# EAGLE board BareBonesArduino-OtherMill-DoubleSided (EAGLE 8.0.0)
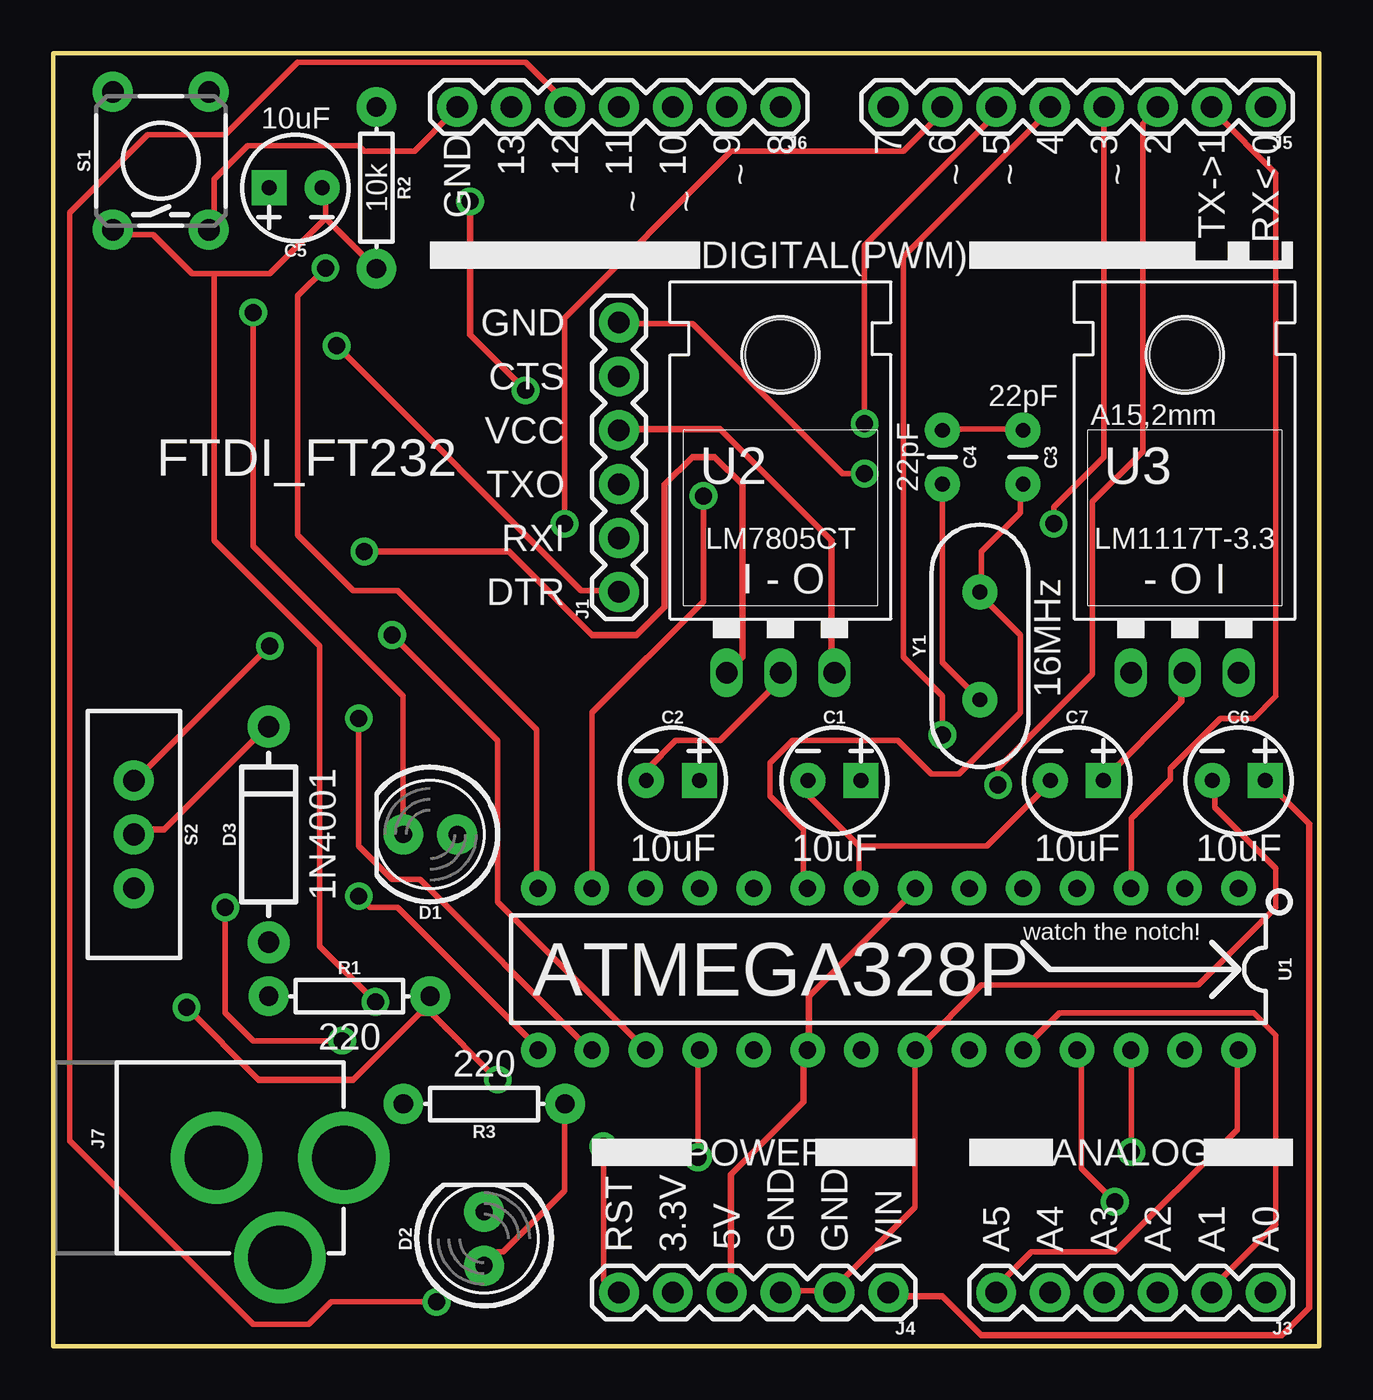
[diagram p0: board, top side]
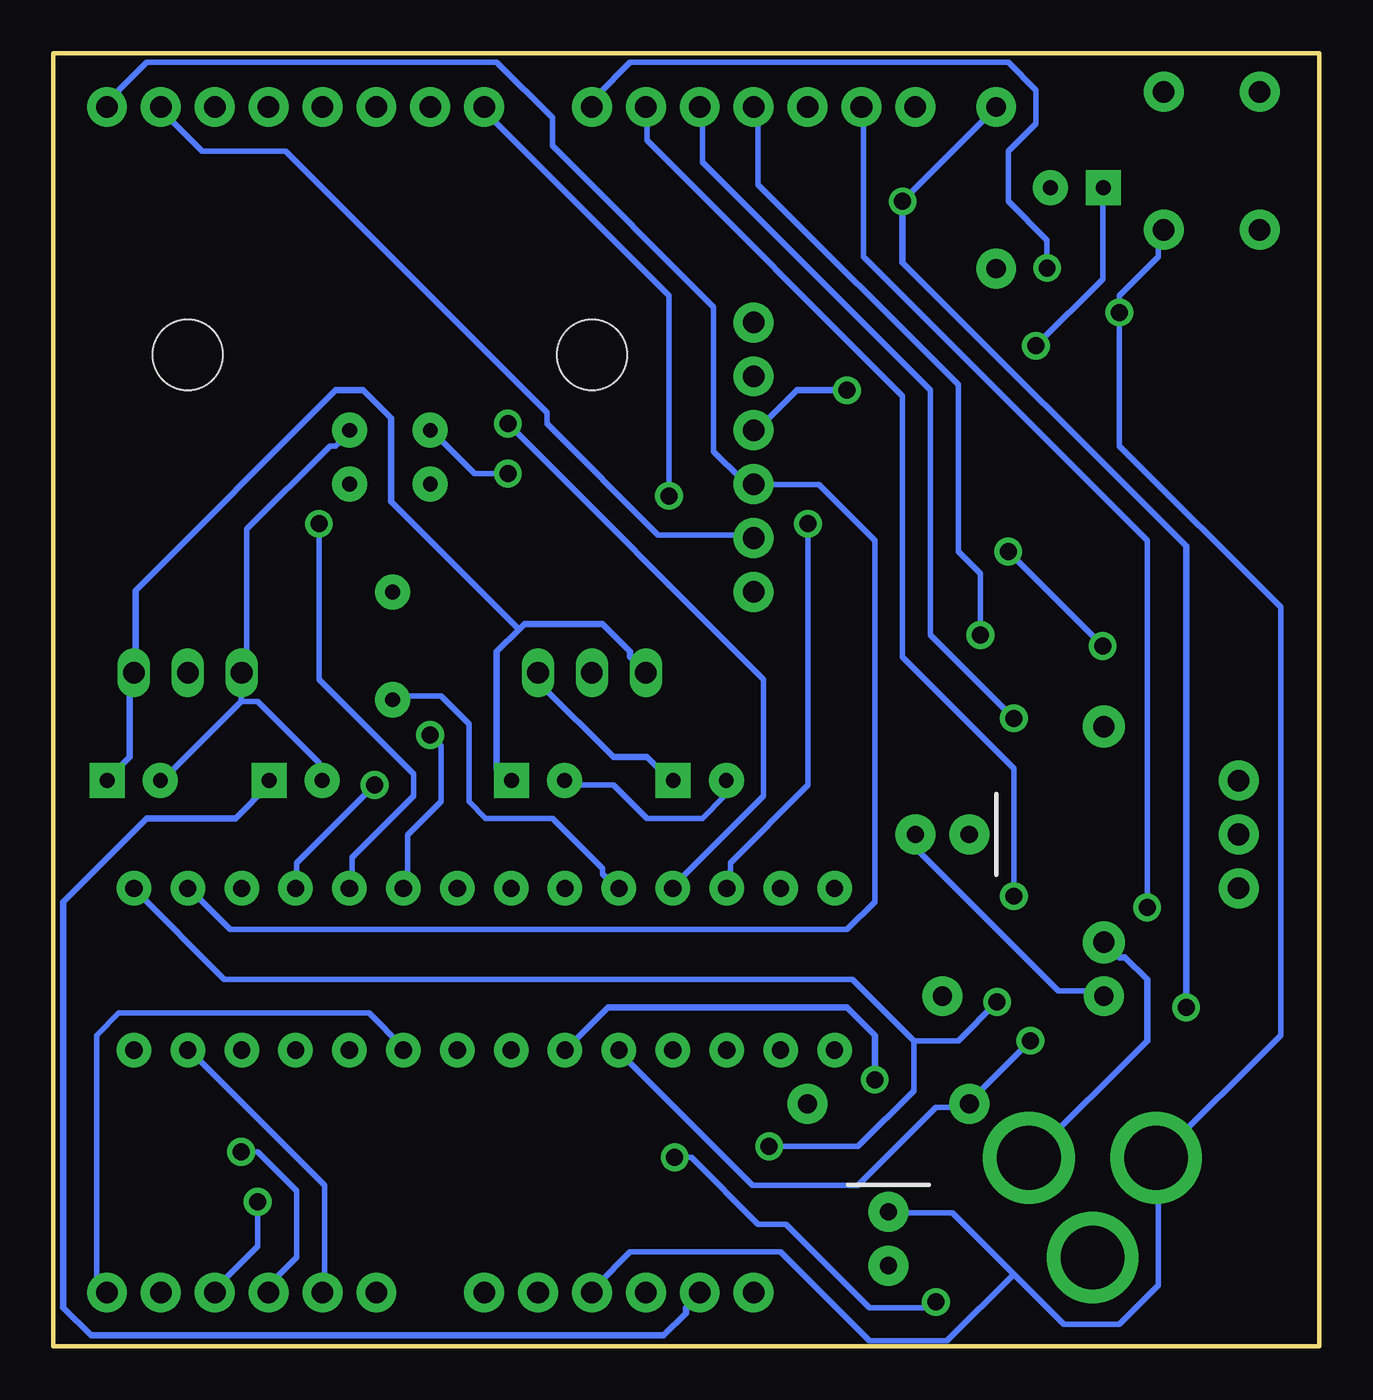
[diagram p1: board, bottom side, seen from below]

Size 59.69 x 60.96 mm. Coordinates in mm from the lower left corner, seen from the top.
Outline: 0,0 0,60.96 59.69,60.96 59.69,0 0,0
Copper layers (1*16): Top 0.035mm / dielectric 1.5mm / Bottom 0.035mm
Design rules "OthermillDRC_1_32_v2": minimum track width 8mil, minimum drill 0.8mm, track to track 0.794003125mm, track to pad 0.794003125mm, pad to pad 0.794003125mm, via to via 0.794003125mm, smd to smd 0mil, copper to edge 0mil, drill to drill 1mil, minimum pad ring 10mil, minimum via ring 10mil, stop-mask expansion 1mil, vias tented up to drill 30mil, thermal gap 10mil
Net classes: 0 default: width 0.254 mm, clearance 0.254 mm; 1 power: width 0.305 mm, clearance 0.254 mm

## Footprints (pad centres in the part's own frame; a part is rotated, then mirrored left to right if it is on the bottom)
CPOL-RADIAL-2.5MM-5MM = drill 0.7 pad 1.651 square: 1 1.25,0 | drill 0.7 pad 1.651: 2 -1.25,0
CAP-PTH-2.54 = drill 0.7 pad 1.651: 1 -1.27,0; 2 1.27,0
LED_5MM = drill 0.813 pad 1.88: A -1.27,0; K 1.27,0
DIODE-1N4001 = drill 1 pad 1.981: A -5.08,0; C 5.08,0
1X06 = drill 1.016 pad 1.88: 1 0,0; 2 2.54,0; 3 5.08,0; 4 7.62,0; 5 10.16,0; 6 12.7,0
1X08 = drill 1.016 pad 1.88: 1 0,0; 2 2.54,0; 3 5.08,0; 4 7.62,0; 5 10.16,0; 6 12.7,0; 7 15.24,0; 8 17.78,0
1X07 = drill 1.016 pad 1.88: 1 0,0; 2 2.54,0; 3 5.08,0; 4 7.62,0; 5 10.16,0; 6 12.7,0; 7 15.24,0
POWER_JACK_PTH = drill 2.997 pad 4.318: GND 0,7.7; GNDBREAK 4.7,10.7; PWR 0,13.7
AXIAL-0.3 = drill 0.9 pad 1.88: P$1 -3.81,0; P$2 3.81,0
TACTILE_SWITCH_PTH_6.0MM = drill 1.016 pad 1.88: 1 -3.251,2.261; 2 3.251,2.261; 3 -3.251,-2.261; 4 3.251,-2.261
SWITCH_SPDT_PTH_11.6X4.0MM = drill 1.016 pad 1.88: 1 0,2.54; 2 0,0; 3 0,-2.54
DIP28 = drill 0.813 pad 1.626: 1 -16.51,-3.81; 2 -13.97,-3.81; 3 -11.43,-3.81; 4 -8.89,-3.81; 5 -6.35,-3.81; 6 -3.81,-3.81; 7 -1.27,-3.81; 8 1.27,-3.81; 9 3.81,-3.81; 10 6.35,-3.81; 11 8.89,-3.81; 12 11.43,-3.81; 13 13.97,-3.81; 14 16.51,-3.81; 15 16.51,3.81; 16 13.97,3.81; 17 11.43,3.81; 18 8.89,3.81; 19 6.35,3.81; 20 3.81,3.81; 21 1.27,3.81; 22 -1.27,3.81; 23 -3.81,3.81; 24 -6.35,3.81; 25 -8.89,3.81; 26 -11.43,3.81; 27 -13.97,3.81; 28 -16.51,3.81
TO-220-ALT = drill 1.016 long: GND 0,-3.81; IN -2.54,-3.81; OUT 2.54,-3.81 | hole 3.302: 0,11.176
78XXL = drill 1.016 long: GND 0,-3.81; IN -2.54,-3.81; OUT 2.54,-3.81 | hole 3.302: 0,11.176
HC49US = drill 0.7 pad 1.651: 1 -2.54,0; 2 2.54,0

## Placement (x,y rotation side)
C1  10uF  [CPOL-RADIAL-2.5MM-5MM]  36.83,26.67 0 top
C2  10uF  [CPOL-RADIAL-2.5MM-5MM]  29.21,26.67 0 top
C3  22pF  [CAP-PTH-2.54]  45.72,41.91 270 top
C4  22pF  [CAP-PTH-2.54]  41.91,41.91 270 top
C5  10uF  [CPOL-RADIAL-2.5MM-5MM]  11.43,54.61 180 top
C6  10uF  [CPOL-RADIAL-2.5MM-5MM]  55.88,26.67 0 top
C7  10uF  [CPOL-RADIAL-2.5MM-5MM]  48.26,26.67 0 top
D1  GREEN  [LED_5MM]  17.78,24.13 180 top
D2  RED  [LED_5MM]  20.32,5.08 90 top
D3  1A/50V/1.1V  [DIODE-1N4001]  10.16,24.13 90 top
FRAME1  FRAME-LETTER  [CREATIVE_COMMONS]  1.27,-8.89 0 top  (outside the outline)
J1  FTDI_FT232  [1X06]  26.67,35.56 90 top
J3  ANALOG_IN  [1X06]  57.15,2.54 180 top
J4  POWER  [1X06]  39.37,2.54 180 top
J5  DIGITAL(PWM)  [1X08]  57.15,58.42 180 top
J6  DIGITAL(PWM)  [1X07]  34.29,58.42 180 top
J7  POWER_JACK  [POWER_JACK_PTH]  0,8.89 270 top
R1  220  [AXIAL-0.3]  13.97,16.51 0 top
R2  10k  [AXIAL-0.3]  15.24,54.61 270 top
R3  220  [AXIAL-0.3]  20.32,11.43 180 top
S1  RESET  [TACTILE_SWITCH_PTH_6.0MM]  5.08,55.88 90 top
S2  SPDT  [SWITCH_SPDT_PTH_11.6X4.0MM]  3.81,24.13 180 top
U1  328P  [DIP28]  39.37,17.78 180 top
U2  LM7805CT  [TO-220-ALT]  34.29,35.56 0 top
U3  LM1117T-3.3  [78XXL]  53.34,35.56 0 top
Y1  16MHz  [HC49US]  43.69,33.02 90 top

## Library data of the parts
C1 C2 C5-C7 = SparkFun-Capacitors; PROD_ID: CAP-08440
C3 C4 = SparkFun-Capacitors; PROD_ID: CAP-09128
D1 D2 = SparkFun-LED
D3 = SparkFun-DiscreteSemi; PROD_ID: DIO-09176
FRAME1 = SparkFun-Aesthetics
J1 J6 = SparkFun-Connectors
J3 J4 = SparkFun-Connectors; PROD_ID: CONN-08437
J5 = SparkFun-Connectors; PROD_ID: CONN-08438
J7 = SparkFun-Connectors; PROD_ID: CONN-08197
R1 R3 = SparkFun-Resistors; PROD_ID: RES-08380
R2 = SparkFun-Resistors; PROD_ID: RES-09435
S1 = SparkFun-Switches; PROD_ID: SWCH-08441; SF_SKU: COM-00097
S2 = SparkFun-Switches; PROD_ID: SWCH-08261; SF_SKU: COM-00102
U1 = SparkFun-IC-Microcontroller; PROD_ID: IC-09136
U2 = SparkFun-IC-Power; PROD_ID: VREG-08450; SF_ID: COM-00107
U3 = SparkFun-IC-Power
Y1 = SparkFun-Clocks; PROD_ID: XTAL-08181; SF_ID: COM-00536

## Nets
3.3V [power]: C7.1 J4.5 U3.GND
A0: J3.1 U1.23
A1: J3.2 U1.24
A2: J3.3 U1.25
A3: J3.4 U1.26
A4: J3.5 U1.27
A5: J3.6 U1.28
AREF: U1.21
CTS: J1.5
D0(RX): J1.3 J5.1 U1.2
D1(TX): J1.2 J5.2 U1.3
D2: J5.3 U1.4
D3(PWM): J5.4 U1.5
D4: J5.5 U1.6
D5(PWM): J5.6 U1.11
D6(PWM): J5.7 U1.12
D7: J5.8 U1.13
D8: J6.1 U1.14
D9(PWM): J6.2 U1.15
D10(PWM): J6.3 U1.16
D11(PWM): J6.4 U1.17
D12: J6.5 U1.18
D13(LED): J6.6 R3.P$2 U1.19
DTR: C5.1 J1.1
GND: C1.2 C2.2 C3.1 C4.1 C6.2 C7.2 D1.K D2.K J1.6 J4.2 J4.3 J6.7 J7.GND S1.3 U1.8 U1.22 U2.GND U3.IN
GNDBREAK: J7.GNDBREAK
N$1: D2.A R3.P$1
N$2 [power]: D3.C S2.2
N$3: D1.A R1.P$1
PWR [power]: D3.A J7.PWR
RESET: C5.2 J4.6 R2.P$2 S1.1 U1.1
VCC [power]: C2.1 J1.4 J4.4 R1.P$2 R2.P$1 U1.7 U1.20 U2.OUT
VIN [power]: C1.1 C6.1 J4.1 S2.3 U2.IN U3.OUT
XTAL1: C3.2 U1.9 Y1.2
XTAL2: C4.2 U1.10 Y1.1

## Tracks (layer width: path | path; a pad name or v marks a point on that pad's centre or on a via)
3.3V
  Top 0.305: U3.GND 53.19,31.7 53.19,30.39 49.52,26.72 C7.1
  Bottom 0.305: J4.5 29.34,2.36 29.87,1.83 29.87,1.57 30.92,0.52 57.9,0.52 59.21,1.83 59.21,20.96 55.28,24.89 51.09,24.89 49.52,26.46 C7.1
A0
  Bottom 0.254: U1.23 43.23,14.15 44.8,15.72 56.59,15.72 57.64,14.67 57.64,2.88 57.38,2.62 J3.1
A1
  Top 0.254: U1.24 45.85,14.15 47.42,15.72 56.59,15.72 57.64,14.67 57.64,5.76 54.5,2.62 J3.2
A2  (via drill 0.8)
  Top 0.254: v50.04,6.81 48.47,8.38 48.47,13.89 U1.25
  Bottom 0.254: v50.04,6.81 50.04,4.72 52.14,2.62 J3.3
A3  (via drill 0.8)
  Top 0.254: v50.83,9.17 50.83,13.89 U1.26
  Bottom 0.254: v50.83,9.17 50.04,9.17 48.21,7.34 48.21,4.19 49.78,2.62 J3.4
A4
  Bottom 0.254: U1.27 53.19,13.89 46.9,7.6 46.9,2.62 J3.5
A5
  Top 0.254: U1.28 55.81,13.89 55.81,10.22 50.04,4.45 46.11,4.45 44.28,2.62 J3.6
D0(RX)
  Bottom 0.254: U1.2 53.19,21.48 51.35,19.65 22.27,19.65 20.96,20.96 20.96,37.99 23.58,40.61 26.46,40.61 J1.3 26.72,40.87 27.25,40.87 28.56,42.18 28.56,48.99 36.16,56.59 36.16,57.9 38.78,60.52 55.28,60.52 56.59,59.21 56.59,58.95 57.12,58.43 J5.1
D1(TX)
  Top 0.254: U1.3 50.83,21.75 50.83,24.89 52.66,26.72 52.66,27.25 55.02,29.61 56.59,29.61 57.64,30.65 57.64,55.28 54.76,58.16 J5.2
  Bottom 0.254: J1.2 26.72,38.25 31.18,38.25 36.42,43.49 36.42,44.02 48.73,56.33 52.66,56.33 54.5,58.16 J5.2
D2  (via drill 0.8)
  Top 0.254: v44.54,26.46 44.54,27.25 48.99,31.7 48.99,39.82 51.35,42.18 51.35,57.64 51.88,58.16 J5.3
  Bottom 0.254: v44.54,26.46 48.21,22.79 48.21,21.75 U1.4
D3(PWM)  (via drill 0.8)
  Top 0.254: v47.16,38.78 47.16,39.56 49.52,41.92 49.52,58.16 J5.4
  Bottom 0.254: v47.16,38.78 47.16,31.44 42.71,26.99 42.71,25.94 45.59,23.06 45.59,21.75 U1.5
D4  (via drill 0.8)
  Top 0.254: v41.92,28.82 41.92,30.65 40.09,32.49 40.09,51.35 46.9,58.16 J5.5
  Bottom 0.254: v41.92,28.82 41.4,28.3 41.4,25.68 42.97,24.1 42.97,21.75 U1.6
D5(PWM)  (via drill 0.8)
  Top 0.254: v38.25,43.49 38.25,51.88 44.54,58.16 J5.6
  Bottom 0.254: v38.25,43.49 26.2,31.44 26.2,25.94 30.39,21.75 U1.11
D6(PWM)  (via drill 0.8)
  Top 0.254: v24.1,38.78 24.1,48.47 31.96,56.33 40.09,56.33 41.92,58.16 J5.7
  Bottom 0.254: v24.1,38.78 24.1,26.46 27.77,22.79 27.77,21.75 U1.12
D7  (via drill 0.8)
  Top 0.254: v30.65,40.09 30.65,35.11 25.41,29.87 25.41,21.75 U1.13
  Bottom 0.254: v30.65,40.09 30.65,49.52 39.3,58.16 J5.8
D8  (via drill 0.8)
  Top 0.254: v12.84,50.83 11.53,49.52 11.53,38.25 14.15,35.63 16.24,35.63 22.79,29.08 22.79,21.75 U1.14
  Bottom 0.254: v12.84,50.83 12.84,52.14 14.67,53.97 14.67,56.33 13.36,57.64 13.36,59.21 14.67,60.52 32.49,60.52 34.06,58.95 34.06,58.43 J6.1
D9(PWM)  (via drill 0.8)
  Top 0.254: v14.41,21.22 14.93,20.7 16.24,20.7 22.79,14.15 U1.15
  Bottom 0.254: v14.41,21.22 14.41,27.25 19.65,32.49 19.65,44.8 31.7,56.85 31.7,58.16 J6.2
D10(PWM)  (via drill 0.8)
  Top 0.254: v14.41,29.61 14.41,23.58 15.98,22.01 17.29,22.01 25.15,14.15 U1.16
  Bottom 0.254: v14.41,29.61 18.34,33.54 18.34,45.06 29.08,55.81 29.08,58.16 J6.3
D11(PWM)  (via drill 0.8)
  Top 0.254: v15.98,33.54 20.96,28.56 20.96,20.96 27.77,14.15 U1.17
  Bottom 0.254: v15.98,33.54 15.98,36.42 17.03,37.47 17.03,45.33 26.46,54.76 26.46,58.16 J6.4
D12  (via drill 0.8)
  Top 0.254: v30.39,8.91 30.39,13.89 U1.18 | v18.08,2.1 13.1,2.1 12.05,1.05 9.43,1.05 0.79,9.69 0.79,53.45 4.45,57.12 8.12,57.12 11.53,60.52 22.27,60.52 24.37,58.43 J6.5
  Bottom 0.254: v30.39,8.91 29.61,8.91 26.46,5.76 25.15,5.76 21.22,1.83 18.34,1.83 v18.08,2.1
D13(LED)  (via drill 0.8)
  Top 0.254: v8.12,20.7 8.12,15.72 9.43,14.41 v13.62,14.41
  Bottom 0.254: U1.19 33.01,13.89 26.72,7.6 21.75,7.6 18.08,11.27 16.77,11.27 R3.P$2 16.51,11.53 v13.62,14.41 | v8.12,20.7 8.12,37.99 21.48,51.35 21.48,58.16 J6.6
DTR  (via drill 0.8)
  Top 0.254: v13.36,47.16 24.89,35.63 26.46,35.63 J1.1
  Bottom 0.254: v13.36,47.16 10.22,50.3 10.22,54.5 C5.1
GND  (via drill 0.8)
  Top 0.254: C4.1 41.92,43.23 45.59,43.23 C3.1 | v38.25,41.13 37.2,41.13 30.13,48.21 26.72,48.21 J1.6 | 37.99,23.58 37.99,21.75 U1.8 | 37.99,23.58 35.63,25.94 35.63,26.46 C1.2 | U2.GND 34.06,31.7 34.06,31.18 31.44,28.56 29.34,28.56 28.03,27.25 28.03,26.72 C2.2 | 37.99,23.58 44.02,23.58 46.9,26.46 C7.2 | S1.3 7.6,52.66 7.6,55.02 9.17,56.59 14.41,56.59 14.67,56.33 17.03,56.33 18.86,58.16 J6.7 | v9.43,48.73 9.43,37.73 16.51,30.65 16.51,24.37 D1.K | 36.68,2.62 40.61,6.55 40.61,13.89 U1.22 40.87,14.15 43.75,17.03 53.97,17.03 57.64,20.7 57.64,22.53 54.76,25.41 54.76,26.46 C6.2 | 36.68,2.62 34.32,2.62 J4.3 | 36.68,2.62 J4.2
  Bottom 0.254: v38.25,41.13 39.82,41.13 41.66,42.97 C4.1 | 50.83,30.39 50.83,31.7 U3.IN 50.57,31.96 50.57,38.51 46.64,42.44 46.37,42.44 45.85,42.97 C3.1 | 50.83,30.39 54.5,26.72 C6.2 | 50.83,30.39 50.04,30.39 47.16,27.51 47.16,26.72 C7.2 | C1.2 35.37,26.46 33.27,26.46 31.7,24.89 29.08,24.89 28.03,25.94 28.03,26.46 C2.2 | S1.3 7.6,52.4 7.6,51.35 9.43,49.52 v9.43,48.73 9.43,42.44 1.83,34.85 1.83,14.67 7.6,8.91 J7.GND 7.6,8.65 7.6,2.88 9.43,1.05 12.05,1.05 14.41,3.41 | 14.41,3.41 17.29,6.29 20.17,6.29 D2.K | 14.41,3.41 17.55,0.26 21.22,0.26 25.41,4.45 32.49,4.45 34.06,2.88 34.06,2.62 J4.3
N$1
  Top 0.254: D2.A 20.44,3.93 20.96,4.45 21.22,4.45 24.1,7.34 24.1,11.27 R3.P$1
N$2
  Top 0.305: S2.2 3.93,24.37 5.24,24.37 9.96,29.08 D3.C
N$3
  Bottom 0.254: R1.P$1 10.22,16.77 12.31,16.77 18.86,23.32 18.86,24.1 D1.A
PWR
  Bottom 0.305: D3.A 9.96,18.86 9.43,18.34 9.17,18.34 8.12,17.29 8.12,14.41 13.62,8.91 J7.PWR
RESET  (via drill 0.8)
  Top 0.254: 12.84,53.19 12.84,54.5 C5.2 | 12.84,53.19 15.2,50.83 R2.P$2 | 7.6,50.57 10.22,50.57 12.84,53.19 | 7.6,50.57 6.55,50.57 4.72,52.4 2.88,52.4 S1.1 | v25.94,9.43 25.94,3.14 26.46,2.62 J4.6 | 7.6,50.57 7.6,37.99 12.58,33.01 12.58,18.86 v15.2,16.24
  Bottom 0.254: 19.13,14.41 22.01,17.29 51.61,17.29 55.81,21.48 U1.1 | 19.13,14.41 19.13,12.05 21.75,9.43 v25.94,9.43 | v15.2,16.24 17.03,14.41 19.13,14.41
VCC  (via drill 0.8)
  Top 0.305: U1.7 40.61,21.48 35.63,16.51 35.63,14.15 U1.20 35.37,13.89 35.37,11.53 31.96,8.12 31.96,2.62 J4.4 | 17.82,15.72 17.82,16.51 R1.P$2 17.82,15.72 | v20.96,12.58 17.82,15.72 | J1.4 26.72,43.23 31.44,43.23 36.68,37.99 36.68,31.96 U2.OUT | v19.65,53.97 19.65,47.68 v22.27,45.06 | 17.82,15.72 17.29,15.72 14.15,12.58 9.69,12.58 v6.29,15.98
  Bottom 0.305: v20.96,12.58 20.96,14.67 22.27,15.98 33.54,15.98 35.37,14.15 U1.20 | U2.OUT 36.68,31.7 36.68,31.18 33.27,27.77 31.7,27.77 30.65,26.72 C2.1 | v22.27,45.06 24.63,45.06 26.46,43.23 J1.4 | R2.P$1 15.46,58.16 v19.65,53.97 19.65,51.09 6.29,37.73 v6.29,15.98
VIN  (via drill 0.8)
  Top 0.305: J4.1 39.56,2.36 41.92,2.36 43.75,0.52 57.9,0.52 59.21,1.83 59.21,24.63 57.38,26.46 C6.1 | v10.22,33.01 3.93,26.72 S2.3 | v14.67,37.47 21.48,37.47 25.41,33.54 27.51,33.54 28.82,34.85 28.82,40.61 30.13,41.92 31.18,41.92 32.49,40.61 32.49,32.49 U2.IN
  Bottom 0.305: C6.1 57.12,26.72 56.07,27.77 56.07,31.7 U3.OUT 55.81,31.96 55.81,35.63 46.37,45.06 45.06,45.06 43.75,43.75 43.75,39.82 37.73,33.8 | U2.IN 32.49,32.49 32.49,32.75 33.8,34.06 37.47,34.06 37.73,33.8 | 37.73,33.8 38.78,32.75 38.78,27.25 38.25,26.72 C1.1 | v14.67,37.47 v10.22,33.01
XTAL1
  Top 0.254: U1.9 35.37,21.75 35.37,24.37 33.8,25.94 33.8,27.51 34.85,28.56 39.82,28.56 41.4,26.99 42.71,26.99 45.59,29.87 45.59,33.54 43.75,35.37 Y1.2 43.75,35.63 43.75,37.47 45.59,39.3 45.59,40.61 C3.2
XTAL2
  Top 0.254: C4.2 41.92,40.61 41.92,32.23 43.49,30.65 Y1.1
  Bottom 0.254: U1.10 33.27,21.75 33.8,22.27 33.8,22.53 36.16,24.89 39.3,24.89 40.09,25.68 40.09,29.34 41.4,30.65 43.49,30.65 Y1.1

## Text on the board
tPlace: 10uF | GND | 13 | 12 | 11 | 10 | 9 | 8 | 7 | 6 | 5 | 4 | 3 | 2 | TX->1 | RX<-0 | 10k | ~ | ~ | ~ | ~ | ~ | ~ | DIGITAL(PWM) | GND | CTS | 22pF | VCC | FTDI_FT232 | 22pF | TXO | RXI | LM7805CT | LM1117T-3.3 | DTR | I - O | - O I | 16MHz | 1N4001 | 10uF | 10uF | 10uF | 10uF | watch the notch! | ATMEGA328P | 220 | 220 | POWER | ANALOG | 5V | RST | 3.3V | GND | GND | VIN | A5 | A4 | A3 | A2 | A1 | A0
tDocu: Phi Luu